# Altium PCB OK6410AV2.PcbDoc (part 2 of 4)
Units mm, origin at the board's own origin, x right, y up, seen from the top; angles counter-clockwise.
Board outline 144.31 x 105.28 mm, 4 copper layers (Top, GND, VCC, Bottom), stack 0.899 mm thick; 254 components, 278 nets, 1261 pads, 740 vias.
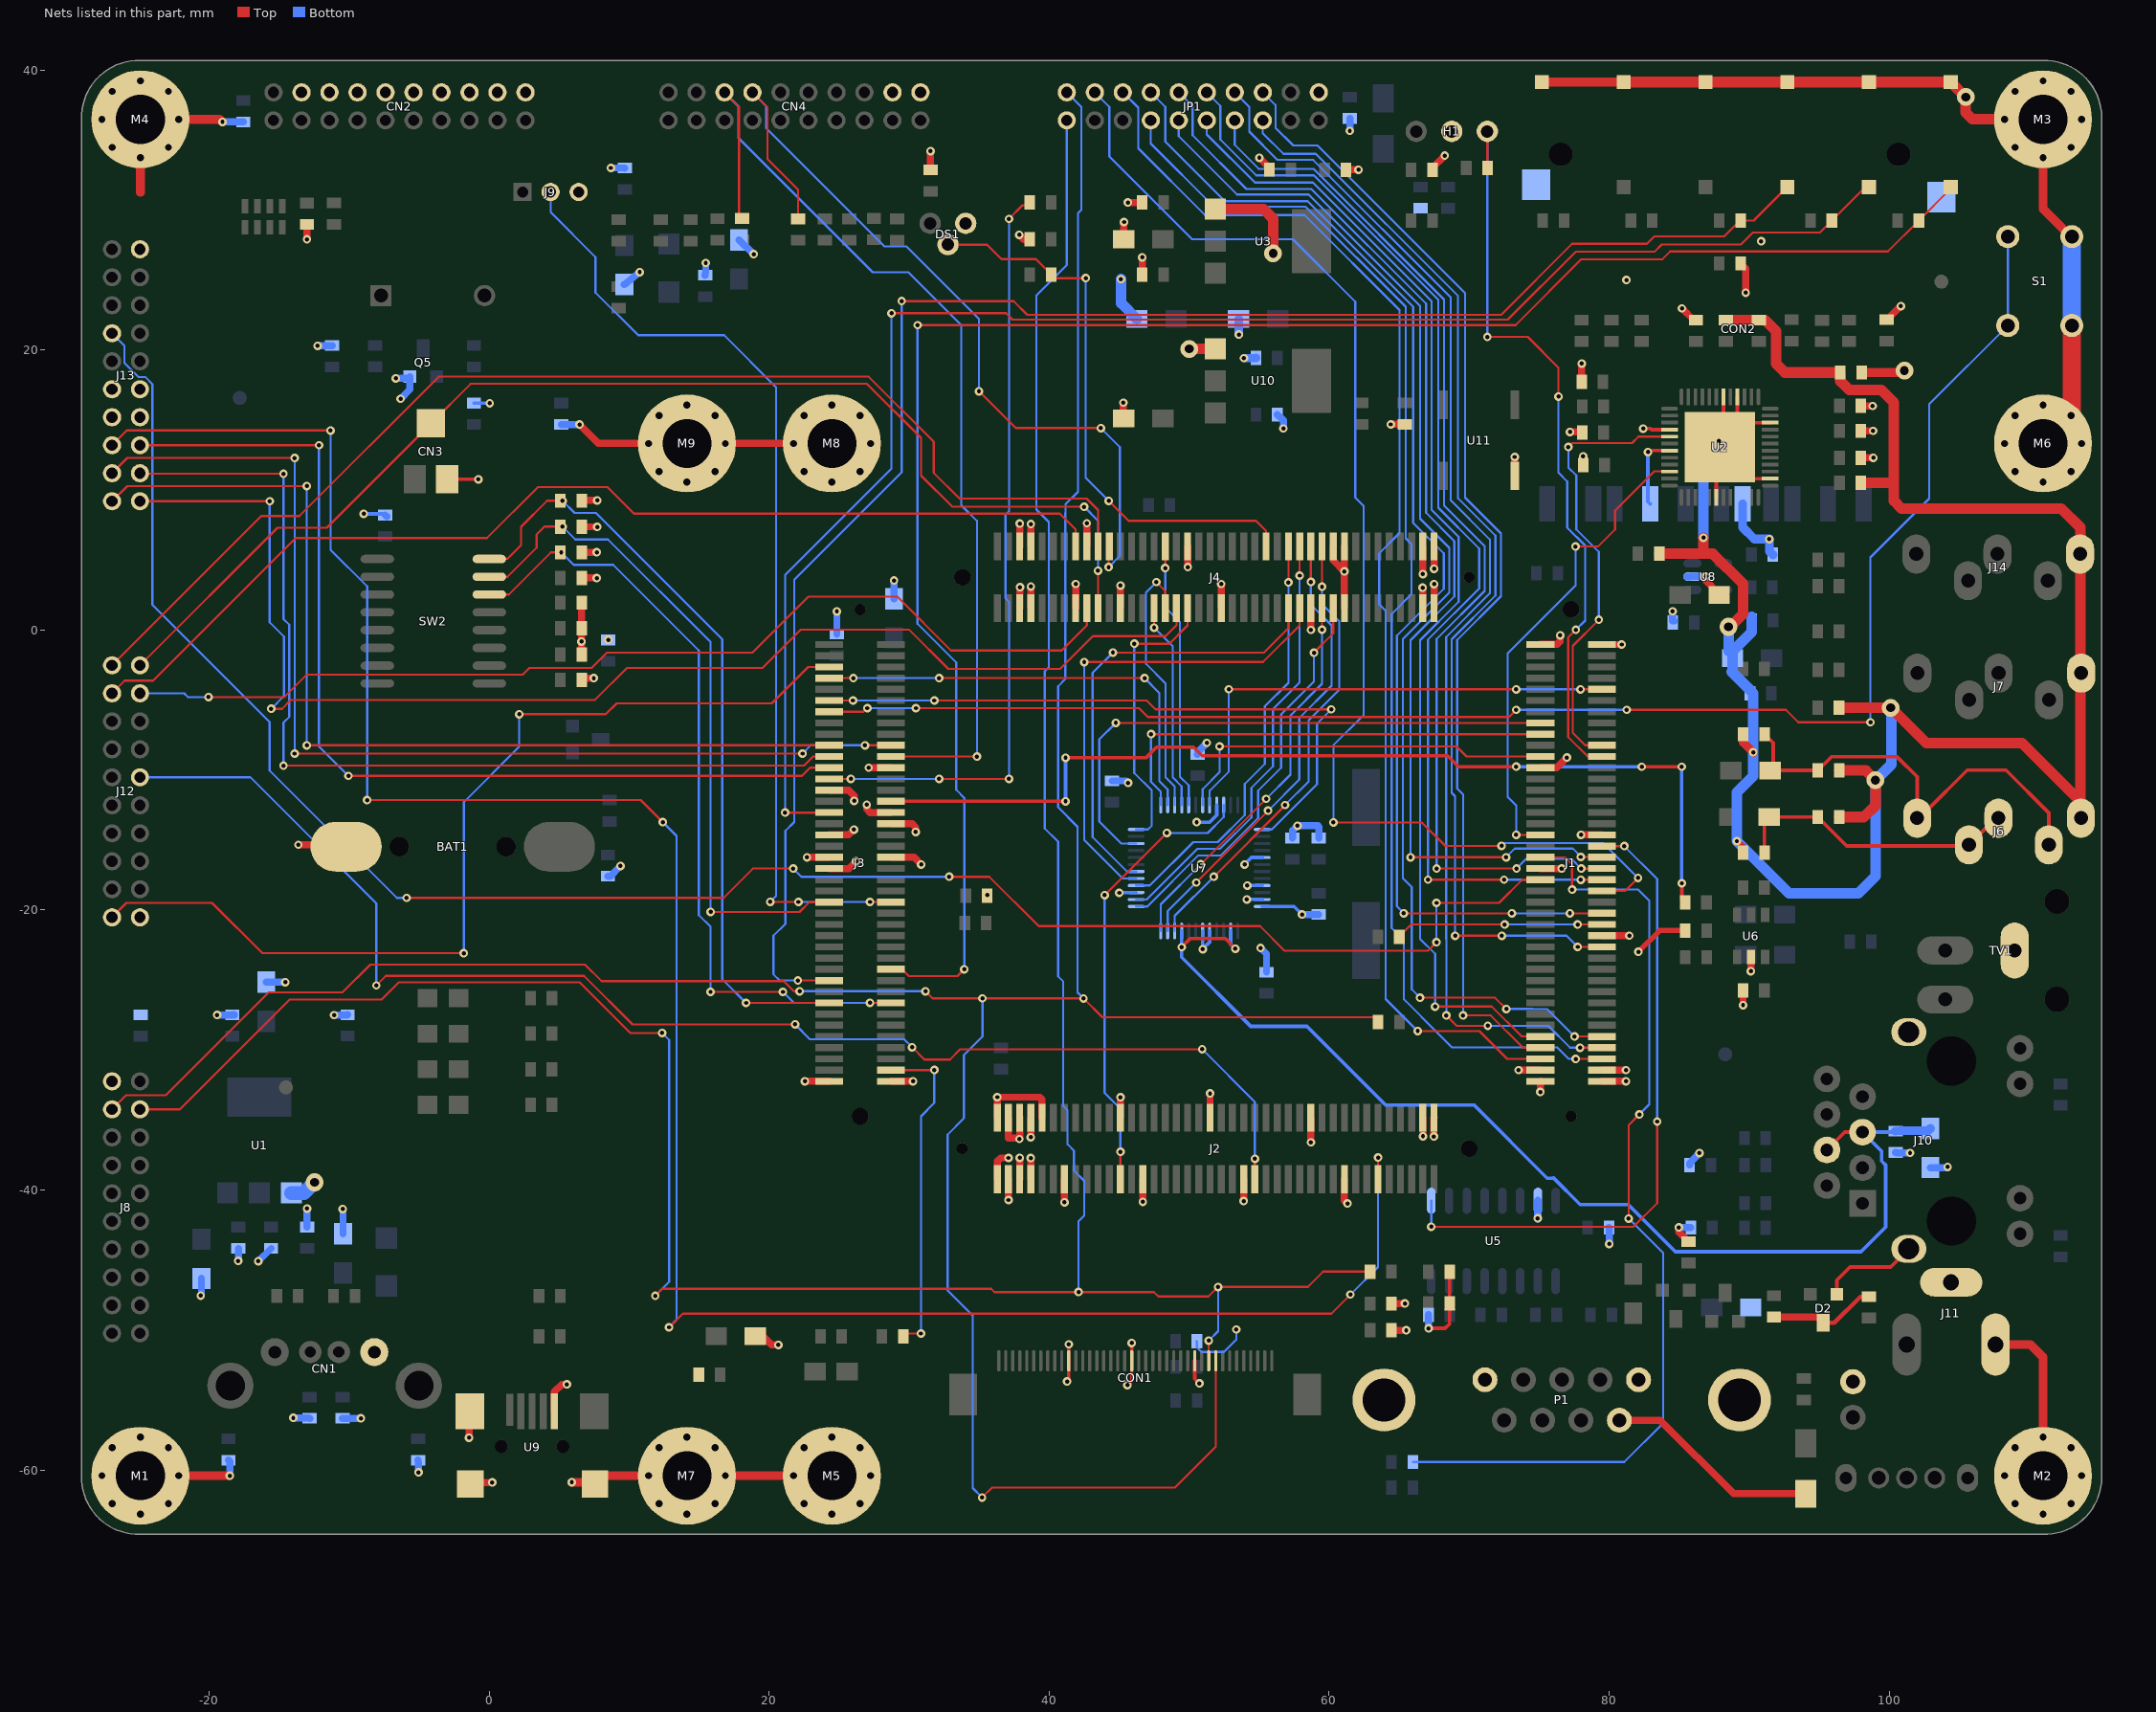
[diagram p4: the nets of this part, all layers, seen from the top]

## Via types
v1: diameter 0.61, hole 0.305, Top to Bottom, tented both sides, 719 vias
v2: diameter 1.27, hole 0.635, Top to Bottom, tented both sides, 21 vias

## Nets (pads, with @x,y where several pads share a name; then routed paths per layer and width w, separated by ;. In a path a pad name is that pad's centre, name@x,y a point inside that pad or via, vN(x,y) a via of type N, cw(c..) or ccw(c..) an arc to the next point about the centre after c; other vN are vias at no path point) (continued)
AC97_SDO: J1.19 U2.5 | length 32.1
  Top w0.152: v1(77.089,13.081) 77.371,13.363 81.642,13.363 82.1,13.821 U2.5@84.31,13.821 ; v1(79.26,0.74) 77.394,-1.126 77.394,-7.337 78.288,-8.231 J1.19@79.488,-8.231
  Bottom w0.152: v1(77.089,13.081) 77.089,11.608 77.648,11.049 77.648,7.188 79.26,5.576 v1(79.26,0.74)
AC97_SYNC: J1.36 U2.10 | length 34.3
  Top w0.152: v1(73.364,-14.631) 74.782,-14.631 J1.36@75.088,-14.631 ; v1(77.597,5.969) 79.197,5.969 80.416,7.188 80.416,8.534 83.231,11.349 84.282,11.349 U2.10@84.31,11.321
  Bottom w0.152: v1(73.364,-14.631) 73.364,-12.528 72.746,-11.911 72.746,-1.663 77.597,3.188 v1(77.597,5.969)
ADCIN0: CN3.2 J4.20 J12.19 | length 88.6
  Top w0.152: J12.19@-24.95,-2.517 -15.124,7.309 -11.614,7.309 -4.156,14.767 -1.334,17.589 26.987,17.589 30.845,13.731 30.845,11.041 33.08,8.807 v1(42.496,8.807) ; J4.20@43.49,1.569 43.49,3.256 v1(43.489,4.248)
  Bottom w0.152: v1(42.496,8.807) 43.489,7.814 v1(43.489,4.248)
ADCIN1: J4.19 J12.20 | length 86.8
  Top w0.152: J12.20@-26.95,-2.517 -16.286,8.147 -13.57,8.147 -3.614,18.103 27.109,18.103 31.749,13.462 31.749,11.232 33.589,9.393 42.664,9.393 43.49,8.568 J4.19@43.49,5.969
ADCIN2: J4.18 J12.17 | length 74.3
  Top w0.152: v1(-20.06,-4.782) -14.635,-4.782 -13.028,-3.175 2.406,-3.175 2.876,-2.705 7.313,-2.705 8.405,-1.613 18.802,-1.613 22.802,2.388 29.144,2.388 32.984,-1.453 40.896,-1.453 42.69,0.34 J4.18@42.69,1.569
  Bottom w0.152: J12.17@-24.95,-4.517 -21.8,-4.517 -21.536,-4.782 v1(-20.06,-4.782)
ADCIN3: J4.15 J12.18 | length 77.4
  Top w0.152: J12.18@-26.95,-4.517 -26.041,-3.608 -24.013,-3.608 -13.827,6.577 -0.168,6.577 3.475,10.221 8.436,10.221 10.333,8.324 40.764,8.324 41.89,7.198 J4.15@41.89,5.969
ADDR2: J1.9 U7.32 | length 35.5
  Top w0.152: v1(52.831,-4.227) v1(73.364,-4.23) ; v1(77.952,-4.23) J1.9@79.488,-4.231
  Bottom w0.152: U7.32@51.464,-12.495 51.464,-11.474 52.831,-10.107 v1(52.831,-4.227) ; v1(73.364,-4.23) v1(77.952,-4.23)
AVDD25: C76.2 C77.1 J10.4 J10.5 U7.2 U7.9 | length 83.2
  Top w0.254: v1(49.464,-22.647) 50.086,-22.024 52.562,-22.024 53.291,-22.753 v1(53.291,-22.764) ; J10.4@95.56,-37.137 96.83,-35.867 J10.5@98.1,-35.867
  Bottom w0.254: v1(49.464,-22.647) 49.464,-23.373 54.398,-28.307 58.406,-28.307 64.031,-33.932 70.355,-33.932 75.574,-39.152 76.029,-39.152 76.035,-39.145 77.933,-41.043 81.368,-41.043 84.723,-44.398 97.999,-44.398 99.75,-42.647 99.75,-38.222 99.456,-37.927 99.456,-37.222 J10.5@98.1,-35.867 100.599,-35.867 100.523,-35.791 C76.2@100.461,-35.791 ; v1(49.464,-22.647) U7.9@49.464,-21.495 ; U7.2@52.964,-21.495 52.964,-22.436 v1(53.291,-22.764)
  Bottom w0.635: C76.2@100.461,-35.791 100.834,-35.758 102.774,-35.758 C77.1@102.955,-35.599
CAMCLK: J1.51 R85.2 | length 14.9
  Top w0.152: R85.2@65.009,-21.924 65.009,-21.887 65.865,-21.031 v1(72.535,-21.031) ; v1(77.747,-21.031) J1.51@79.488,-21.031
  Bottom w0.152: v1(72.535,-21.031) v1(77.747,-21.031)
CAMHREF: J1.76 JP1.6 | length 90.7
  Top w0.152: v1(66.324,-28.641) 70.732,-28.641 72.722,-30.631 J1.76@75.088,-30.631
  Bottom w0.152: JP1.6@45.257,38.412 46.356,37.314 46.356,34.419 51.133,29.642 58.246,29.642 65.031,22.857 65.031,6.928 63.576,5.473 63.576,1.84 64.034,1.382 64.034,-26.352 v1(66.324,-28.641)
CAMPCLK: J1.49 JP1.8 | length 86.5
  Top w0.152: v1(65.332,-20.231) v1(73.056,-20.231) ; v1(77.193,-20.231) 79.248,-20.231 J1.49@79.488,-20.231
  Bottom w0.152: JP1.8@47.257,38.412 48.3,37.37 48.3,34.89 52.548,30.642 58.462,30.642 66.006,23.098 66.006,7.659 68.181,5.485 68.181,2.95 64.831,-0.4 64.831,-19.731 v1(65.332,-20.231) ; v1(73.056,-20.231) 74.641,-20.231 v1(77.193,-20.231)
CAMRSTN: J1.45 JP1.4 | length 91.8
  Top w0.152: v1(60.3,-13.741) 66.624,-13.741 68.301,-15.418 v1(72.314,-15.418) ; J1.45@79.488,-18.631 81.14,-18.631 v1(82.067,-17.704)
  Bottom w0.152: JP1.4@43.257,38.412 44.301,37.369 44.301,33.835 50.217,27.919 57.41,27.919 61.864,23.465 61.864,9.459 62.459,8.865 62.459,-6.071 60.3,-8.23 v1(60.3,-13.741) ; v1(72.314,-15.418) 72.517,-15.215 79.578,-15.215 v1(82.067,-17.704)
CAMVSYNC: J1.75 JP1.7 | length 91.2
  Top w0.152: v1(77.618,-30.635) J1.75@79.488,-30.631
  Bottom w0.152: JP1.7@47.257,36.412 47.257,34.752 51.773,30.237 58.329,30.237 65.464,23.102 65.464,6.552 65.886,6.129 65.886,2.568 64.457,1.14 64.457,-21.284 65.334,-22.162 65.334,-26.37 65.484,-26.52 67.646,-28.684 67.66,-28.697 68.769,-29.807 76.28,-29.807 77.108,-30.635 v1(77.618,-30.635)
CAMYDATA0: J1.74 JP1.16 | length 81.9
  Top w0.152: v1(69.57,-27.529) 71.541,-27.529 73.843,-29.831 J1.74@75.088,-29.831
  Bottom w0.152: JP1.16@55.257,38.412 56.165,37.505 56.165,35.891 57.434,34.622 59.16,34.622 69.711,24.072 69.711,9.464 72.272,6.903 72.272,2.424 69.142,-0.706 69.142,-11.313 69.57,-11.74 v1(69.57,-27.529)
CAMYDATA1: J1.55 JP1.15 | length 78.7
  Top w0.152: v1(68.997,-21.834) v1(72.332,-21.834) ; v1(77.75,-22.631) J1.55@79.39,-22.631 ; J1.55@79.39,-22.631 J1.55@79.488,-22.631
  Bottom w0.152: JP1.15@55.257,36.412 55.257,35.5 56.734,34.024 59.045,34.024 69.205,23.864 69.205,9.416 71.88,6.74 71.88,2.464 68.756,-0.661 68.756,-11.62 68.997,-11.862 v1(68.997,-21.834) ; v1(72.332,-21.834) 76.952,-21.834 v1(77.75,-22.631)
CAMYDATA2: J1.73 JP1.14 | length 88.3
  Top w0.152: v1(68.371,-27.529) 69.107,-28.265 v1(71.334,-28.265) ; v1(77.917,-29.832) 79.487,-29.832 J1.73@79.488,-29.831
  Bottom w0.152: JP1.14@53.257,38.412 54.296,37.374 54.296,35.606 56.315,33.587 58.852,33.587 68.676,23.763 68.676,9.277 71.477,6.476 71.477,2.623 68.357,-0.497 68.357,-22.062 68.371,-22.077 v1(68.371,-27.529) ; v1(71.334,-28.265) 75.65,-28.265 77.218,-29.832 v1(77.917,-29.832)
CAMYDATA3: J1.41 JP1.13 | length 76.9
  Top w0.152: v1(67.676,-17.031) v1@73.384,-17.031 ; v1(78.004,-17.038) 79.488,-17.038 J1.41@79.488,-17.031
  Bottom w0.152: JP1.13@53.257,36.412 53.257,34.662 54.966,32.954 58.873,32.954 68.212,23.615 68.212,8.89 71.102,5.999 71.102,2.796 67.676,-0.63 v1(67.676,-17.031) ; v1(73.384,-17.03) 74.068,-16.346 77.313,-16.346 v1(78.004,-17.038)
CAMYDATA4: J1.43 JP1.12 | length 80.7
  Top w0.152: v1(67.061,-17.831) v1(72.494,-17.832) ; v1(77.974,-17.833) J1.43@79.488,-17.831
  Bottom w0.152: JP1.12@51.257,38.412 52.226,37.443 52.226,35.041 54.78,32.487 58.906,32.487 67.788,23.605 67.788,8.748 70.713,5.823 70.713,2.972 67.061,-0.68 v1(67.061,-17.831) ; v1(72.494,-17.832) 76.792,-17.833 v1(77.974,-17.833)
CAMYDATA5: J1.72 JP1.11 | length 83.2
  Top w0.152: v1(67.566,-26.894) 71.614,-26.894 73.752,-29.031 J1.72@75.088,-29.031
  Bottom w0.152: JP1.11@51.257,36.412 51.257,35.408 54.697,31.969 58.832,31.969 67.31,23.491 67.31,8.6 69.249,6.662 69.249,2.032 66.5,-0.717 66.5,-22.076 67.566,-23.124 v1(67.566,-26.894)
CAMYDATA6: J1.39 JP1.10 | length 81
  Top w0.152: v1(65.812,-16.231) v1(72.639,-16.231) ; v1(77.966,-16.205) 79.462,-16.205 J1.39@79.488,-16.231
  Bottom w0.152: JP1.10@49.257,38.412 50.249,37.42 50.249,35.372 50.236,35.359 54.082,31.514 58.723,31.514 66.917,23.32 66.917,8.386 68.943,6.36 68.943,2.404 65.812,-0.727 v1(65.812,-16.231) ; v1(72.639,-16.231) 73.255,-15.615 77.408,-15.615 77.966,-16.173 v1(77.966,-16.205)
CAMYDATA7: J1.71 JP1.9 | length 89.7
  Top w0.152: v1(66.492,-26.264) 71.853,-26.264 v1(72.653,-27.064) ; v1(77.531,-29.032) 79.389,-29.032 79.39,-29.031 J1.71@79.488,-29.031
  Bottom w0.152: JP1.9@49.257,36.412 49.257,35.279 53.419,31.118 58.535,31.118 66.502,23.151 66.502,7.954 68.58,5.875 68.58,2.681 65.268,-0.631 65.268,-17.729 65.893,-18.354 65.893,-25.664 v1(66.492,-26.264) ; v1(72.653,-27.064) 74.511,-27.064 74.5,-27.075 75.574,-27.075 v1(77.531,-29.032)
CLKOUT: J1.40 R16.2 | length 68.1
  Top w0.152: J1.40@75.088,-16.231 76.845,-16.231 77.352,-16.738 v1(77.352,-18.534) ; v1(81.394,-42.036) 81.394,-35.362 v1(82.155,-34.6)
  Bottom w0.152: R16.2@65.975,-59.431 81.079,-59.431 83.853,-56.657 83.853,-44.495 v1(81.394,-42.036) ; v1(77.352,-18.534) 82.068,-18.534 82.871,-19.336 82.871,-33.885 v1(82.155,-34.6)
CSN1: J3.69 U7.37 | length 47.1
  Top w0.152: J3.69@24.289,-5.031 v1(25.988,-5.03) ; v1(31.796,-5.03) 46.961,-5.03 47.595,-5.665 v1(60.147,-5.664)
  Bottom w0.152: v1(25.988,-5.03) 27.014,-5.03 v1(31.796,-5.03) ; U7.37@55.214,-14.245 55.893,-14.245 59.131,-11.007 59.131,-6.68 v1(60.147,-5.664)
CTSN0: J1.37 U5.9 | length 46.8
  Top w0.152: v1(67.292,-42.619) 81.741,-42.619 83.43,-40.93 v1(83.43,-35.108) ; J1.37@79.488,-15.431 v1(81.078,-15.431)
  Bottom w0.152: v1(67.292,-42.619) U5.9@67.292,-40.767 ; v1(81.078,-15.431) 83.43,-17.783 v1(83.43,-35.108)
CTSN1: J1.44 J13.14 | length 137.8
  Top w0.152: v1(-5.913,-19.129) 16.742,-19.129 18.835,-17.035 v1(21.709,-17.035) ; v1(32.857,-17.621) 35.725,-17.621 39.253,-21.148 55.063,-21.148 56.814,-22.899 67.06,-22.899 v1(67.663,-22.296) ; v1(67.663,-19.487) 72.131,-19.487 73.787,-17.831 J1.44@75.088,-17.831
  Bottom w0.152: J13.14@-26.95,21.205 -26.07,20.325 -26.07,19.08 -25.074,18.085 -24.587,18.085 -24.071,17.569 -24.071,1.808 -15.694,-6.568 -15.694,-10.038 -6.603,-19.129 v1(-5.913,-19.129) ; v1(21.709,-17.035) 22.294,-17.621 v1(32.857,-17.621) ; v1(67.663,-22.296) v1(67.663,-19.487)
D2-3: D2.3 R79.2 R81.1 | length 7.7
  Top w0.305: D2.3@95.301,-49.479 96.088,-49.479 97.95,-47.617 R79.2@98.566,-47.617
  Top w0.508: R81.1@91.77,-49.073 94.894,-49.073 D2.3@95.301,-49.479
DAC_OUT0: J3.52 R35.1 | length 70.5
  Top w0.254: J3.52@28.689,-12.231 v1(41.168,-12.231) ; v1(41.168,-9.122) 46.916,-9.122 47.67,-8.368 50.314,-8.368 50.919,-8.972 68.459,-8.972 69.246,-9.759 v1(73.364,-9.759) ; v1(82.331,-9.761) v1(85.181,-9.761) ; v1(85.192,-18.085) 85.192,-19.223 R35.1@85.431,-19.463 85.45,-19.463 R35.1@85.585,-19.597
  Bottom w0.254: v1(41.168,-12.231) v1(41.168,-9.122) ; v1(73.364,-9.759) 73.365,-9.761 v1(82.331,-9.761) ; v1@85.181,-18.085 v1(85.181,-9.761)
DAC_OUT1: J3.75 J12.2 | length 69.3
  Top w0.152: J12.2@-26.95,-20.517 -25.923,-19.491 -19.803,-19.491 -16.21,-23.084 v1(-1.821,-23.084) ; v1(2.137,-6.007) 8.324,-6.007 9.104,-5.227 20.18,-5.227 22.777,-2.631 J3.75@24.289,-2.631
  Bottom w0.152: v1(-1.821,-23.084) -1.821,-12.283 2.137,-8.326 v1(2.137,-6.007)
DATA0: J4.54 U7.18 | length 32.6
  Top w0.152: v1(44.552,-1.608) 55.337,-1.608 57.09,0.145 J4.54@57.09,1.569
  Bottom w0.152: v1(44.552,-1.608) 43.107,-3.053 43.107,-14.797 45.555,-17.245 U7.18@46.214,-17.245
DATA1: J4.56 U7.17 | length 35.3
  Top w0.152: v1(42.5,-2.283) 55.267,-2.283 57.89,0.34 J4.56@57.89,1.569
  Bottom w0.152: 42.499,-6.238 42.499,-14.989 45.256,-17.745 U7.17@46.214,-17.745 ; 42.5,-6.238 v1(42.5,-2.283)
DATA2: J4.53 U7.16 | length 30.3
  Top w0.152: v1(57.09,3.403) 57.09,4.339 J4.53@57.09,5.969
  Bottom w0.152: U7.16@46.214,-18.245 47.19,-18.245 50.288,-15.147 52.033,-15.147 53.966,-13.214 53.966,-10.993 55.403,-9.556 55.403,-5.446 57.09,-3.759 v1(57.09,3.403)
DATA3: J4.55 U7.14 | length 31.4
  Top w0.152: v1(57.89,3.893) 57.89,4.583 57.89,4.584 J4.55@57.89,5.969
  Bottom w0.152: U7.14@46.214,-19.245 46.97,-19.245 50.589,-15.626 52.199,-15.626 54.444,-13.381 54.444,-11.275 55.982,-9.737 55.982,-5.643 57.89,-3.734 v1(57.89,3.893)
DATA4: J4.62 U7.13 | length 28.5
  Top w0.152: v1(58.909,-1.616) 60.29,-0.236 J4.62@60.29,1.569
  Bottom w0.152: U7.13@46.214,-19.745 47.006,-19.745 50.655,-16.096 52.254,-16.096 54.926,-13.424 54.926,-11.466 56.566,-9.826 56.566,-6.026 58.909,-3.683 v1(58.909,-1.616)
DATA5: J4.60 U7.12 | length 27.8
  Top w0.152: v1(50.824,-16.729) v1(55.499,-12.054) ; v1(59.489,0.031) J4.60@59.49,1.569
  Bottom w0.152: U7.12@47.964,-21.495 47.964,-19.589 v1(50.824,-16.729) ; v1(55.499,-12.054) 57.226,-10.327 57.226,-6.099 59.489,-3.835 v1(59.489,0.031)
DATA6: J4.57 U7.11 | length 32.9
  Top w0.152: v1(50.503,-18.034) v1(55.637,-12.9) ; v1(58.69,3.445) J4.57@58.69,5.969
  Bottom w0.152: U7.11@48.464,-21.495 48.464,-20.073 v1(50.503,-18.034) ; v1(55.637,-12.9) 57.861,-10.676 57.861,-6.274 60.173,-3.962 60.173,0.341 58.69,1.824 v1(58.69,3.445)
DATA7: J4.59 U7.10 | length 32.8
  Top w0.152: v1(51.76,-17.617) v1@56.863,-12.515 ; v1(59.49,3.101) J4.59@59.49,5.969
  Bottom w0.152: U7.10@48.964,-21.495 48.964,-20.414 v1(51.76,-17.617) ; v1(56.845,-12.497) 58.527,-10.815 58.527,-6.446 60.711,-4.262 60.711,0.63 59.49,1.852 v1(59.49,3.101)
DATA8: J1.22 U7.31 | length 27.9
  Top w0.152: v1(52.166,-8.31) 69.092,-8.31 69.813,-9.031 J1.22@75.088,-9.031
  Bottom w0.152: U7.31@50.964,-12.495 50.964,-11.36 52.166,-10.159 v1(52.166,-8.31)
DATA9: J4.31 U7.29 | length 19.2
  Top w0.152: v1(48.289,4.425) J4.31@48.29,5.969
  Bottom w0.152: v1(48.289,4.425) 48.289,1.615 49.339,0.566 49.339,-10.475 49.964,-11.1 U7.29@49.964,-12.495
DATA10: J4.30 U7.28 | length 14.9
  Top w0.152: J4.30@47.49,1.569 v1(47.491,0.178)
  Bottom w0.152: v1(47.491,0.178) 48.832,-1.164 48.832,-10.528 49.464,-11.16 U7.28@49.464,-12.495
DATA11: J4.32 U7.27 | length 19.2
  Top w0.152: v1(47.654,3.429) 48.157,2.926 48.163,2.926 48.29,2.799 J4.32@48.29,1.569
  Bottom w0.152: v1(47.654,3.429) 46.918,2.692 46.918,-2.421 48.313,-3.816 48.313,-10.517 48.964,-11.168 U7.27@48.964,-12.495
DATA12: J3.73 U7.26 | length 32.3
  Top w0.152: J3.73@24.289,-3.431 24.403,-3.431 v1(26.006,-3.43) ; v1(32.138,-3.43) v1(46.811,-3.43)
  Bottom w0.152: v1(26.006,-3.43) v1(32.138,-3.43) ; v1(46.811,-3.43) 47.873,-4.493 47.873,-10.796 48.464,-11.387 U7.26@48.464,-12.495
DATA13: J1.18 U7.25 | length 33.2
  Top w0.152: v1(47.273,-7.432) J1.18@75.088,-7.431
  Bottom w0.152: v1(47.273,-7.432) 47.273,-10.841 47.964,-11.532 U7.25@47.964,-12.495
DATA14: J4.36 U7.24 | length 20.3
  Top w0.152: v1(46.079,-0.971) 48.578,-0.971 49.89,0.34 J4.36@49.89,1.569
  Bottom w0.152: v1(46.079,-0.971) 46.079,-10.203 47.329,-11.453 47.329,-13.968 47.052,-14.245 U7.24@46.214,-14.245
DATA15: J1.16 U7.22 | length 41.2
  Top w0.152: v1(44.758,-6.629) 46.524,-6.629 J1.16@75.088,-6.631
  Bottom w0.152: v1(44.758,-6.629) 43.582,-7.805 43.582,-13.682 45.145,-15.245 U7.22@46.214,-15.245
DBGSEL: J3.34 J9.2 | length 69.8
  Top w0.152: v1(20.064,-19.416) v1(22.094,-19.42) ; v1(27.2,-19.42) J3.34@28.689,-19.431
  Bottom w0.152: J9.2@4.382,31.298 4.382,29.856 7.593,26.646 7.593,24.111 10.638,21.066 16.772,21.066 20.491,17.347 20.491,-18.99 v1(20.064,-19.416) ; v1(22.094,-19.42) v1(27.2,-19.42)
EINT13: J3.15 R41.1 SW2.8 | length 55.9
  Top w0.152: SW2.8@0,5.08 1.283,5.08 2.263,6.06 2.263,7.372 4.131,9.24 5.078,9.24 5.231,9.24 v1(5.235,9.235) ; v1(18.337,-26.63) 23.756,-26.63 23.757,-26.631 J3.15@24.289,-26.631
  Bottom w0.152: v1(5.235,9.235) 6.099,8.372 7.618,8.372 16.638,-0.648 16.638,-24.931 v1(18.337,-26.63)
EINT14: J3.33 R52.1 SW2.7 | length 49.3
  Top w0.152: SW2.7@0,3.81 1.304,3.81 3.376,5.882 3.376,6.825 3.942,7.391 5.078,7.391 v1(5.235,7.391) ; v1(15.815,-20.135) 22.164,-20.135 22.868,-19.431 J3.33@24.289,-19.431
  Bottom w0.152: v1(5.235,7.391) 6.147,6.48 8.474,6.48 15.815,-0.861 v1(15.815,-20.135)
EINT15: J3.16 R21.1 SW2.6 | length 57.1
  Top w0.152: SW2.6@0,2.54 1.398,2.54 4.405,5.547 R21.1@5.078,5.548 v1(5.141,5.547) ; v1(15.805,-25.845) v1(20.979,-25.845) ; v1(27.19,-26.629) 27.192,-26.631 J3.16@28.689,-26.631
  Bottom w0.152: v1(5.141,5.547) 6.023,4.666 8.855,4.666 14.971,-1.45 14.971,-20.354 15.805,-21.187 v1(15.805,-25.845) ; v1(20.979,-25.845) 21.763,-26.629 v1(27.19,-26.629)
EINT16: J2.33 J12.11 | length 99.4
  Top w0.152: v1(-8.069,-25.385) -7.378,-24.694 ; -7.378,-24.693 6.765,-24.693 10.239,-28.167 v1(21.85,-28.167) ; v1(30.207,-29.801) 31.081,-30.674 32.906,-30.674 33.642,-29.939 v1(50.926,-29.939) ; J2.33@54.689,-39.231 v1(54.689,-37.765)
  Bottom w0.152: J12.11@-24.95,-10.517 -17.067,-10.517 -8.069,-19.515 v1(-8.069,-25.385) ; v1(21.85,-28.167) 22.905,-29.222 29.628,-29.222 v1(30.207,-29.801) ; v1(50.926,-29.939) 54.689,-33.702 v1(54.689,-37.765)
GND: BAT1.2 C1.2 C2.2 C3.2 C4.2 C5.2 C6.2 C7.2 C8.2 C9.2 C10.2 C12.2 C13.2 C15.2 C16.2 C17.2 C20.1 C21.2 C22.2 C23.2 C24.2 C25.2 C26.2 C27.2 C28.2 C29.2 C30.2 C33.2 C34.2 C39.2 C41.2 C42.2 C50.2 C51.2 C52.2 C53.2 C54.2 C55.2 C58.2 C59.2 C63.2 C67.2 C69.1 C70.1 C71.2 C72.2 C73.2 C74.2 C75.1 C76.1 C77.2 C81.2 C83.2 C84.2 C85.1 C86.2 C90.2 C91.2 C92.2 C94.2 C96.2 C97.2 C98.1 C99.1 C100.1 C101.1 C102.1 C103.1 C104.1 CN1.4 CN2.4 CN2.6 CN2.8 CN2.10 CN2.12 CN2.14 CN2.16 CN2.18 CN2.20 CN3.1 CN4.18 CN4.20 CON1.11 CON1.20 CON1.29 CON2.3@89.535,9.017 CON2.6 CON2.12 CON2.13 D2.1 DS1.1 H1.2 J1.1 J1.2 J1.24 J1.35 J1.42 J1.53 J1.77 J1.78 J1.79 J1.80 J2.2 J2.4 J2.17 J2.24 J2.35 J2.42 J2.53 J2.58 J2.67 J2.72 J2.73 J2.74 J2.75 J2.76 J2.77 J2.78 J2.79 J2.80 J3.1 J3.2 J3.39 J3.41 J3.42 J3.45 J3.48 J3.50 J3.53 J3.58 J4.5 J4.6 J4.7 J4.8 J4.16 J4.17 J4.24 J4.35 J4.42 J4.58 J4.61 J4.63 J4.64 J4.77 J4.78 J4.79 J4.80 J8.20 J9.3 J10.13 J10.14 J11.2 J11.3 J12.1 J13.7 J13.8 J13.9 J13.10 J13.19 J16.2 JP1.20 LED6.2 M1.1 M1.2 M1.3 M1.4 M1.5 M1.6 M1.7 M1.8 M1.9 M2.1 M2.2 M2.3 M2.4 M2.5 M2.6 M2.7 M2.8 M2.9 M3.1 M3.2 M3.3 M3.4 M3.5 M3.6 M3.7 M3.8 M3.9 M4.1 M4.2 M4.3 M4.4 M4.5 M4.6 M4.7 M4.8 M4.9 M5.1 M5.2 M5.3 M5.4 M5.5 M5.6 M5.7 M5.8 M5.9 M6.1 M6.2 M6.3 M6.4 M6.5 M6.6 M6.7 M6.8 M6.9 M7.1 M7.2 M7.3 M7.4 M7.5 M7.6 M7.7 M7.8 M7.9 M8.1 M8.2 M8.3 M8.4 M8.5 M8.6 M8.7 M8.8 M8.9 M9.1 M9.2 M9.3 M9.4 M9.5 M9.6 M9.7 M9.8 M9.9 P1.1 P1.5 P1.6 P1.10 P1.11 Q5.E R5.1 R7.2 R8.2 R9.2 R10.2 R11.2 R21.2 R34.2 R39.1 R41.2 R42.2 R52.2 R53.2 R62.1 R63.2 R72.1 R84.2 R86.2 R89.2 R97.2 S1.3 S1.4 S2.2 S3.2 S4.2 S5.2 S6.2 S7.2 TV1.2 U1.2 U2.4 U2.7 U3.2 U5.15 U6.5 U7.5 U7.6 U7.15 U7.33 U7.41 U7.45 U7.47 U7.48 U8.2 U9.5 U9.6 U9.7 U9.8 U10.2 U11.2 | length 407.6
  Top w0.152: R53.2@35.566,-18.965 v1(35.571,-18.932) ; v1(64.4,14.692) v1@64.4,14.697 ; v1(77.2,14.159) v1@77.2,14.166 ; v1(82.43,14.395) v1@82.481,14.395
  Top w0.254: CN3.1@-3.016,10.776 v1(-0.781,10.776) ; v1(41.283,-53.672) 41.283,-53.612 41.396,-53.499 CON1.11@41.396,-52.199 v1(41.396,-51.018) ; v1(45.586,-53.936) 45.896,-53.626 CON1.20@45.896,-52.199 v1(45.896,-50.921) ; 50.396,-53.481 CON1.29@50.396,-52.199 ; 50.396,-53.481 v1(50.727,-53.812) ; v1(67.103,-49.88) 68.281,-49.88 68.605,-49.555 C30.2@68.605,-45.847 ; v1@82.481,14.395 82.955,14.395 83.029,14.321 U2.4@84.31,14.321 ; v1(82.768,12.716) 82.872,12.821 U2.7@84.31,12.821 ; D2.1@96.266,-47.447 96.266,-46.431 97.206,-45.491 100.105,-45.491 J10.13@101.4,-44.197
  Top w0.381: v1(82.092,-22.982) 83.615,-21.459 R34.2@85.438,-21.459
  Top w0.508: v1(-13.642,-15.334) -10.372,-15.334 BAT1.2@-10.23,-15.476 ; R72.1@-13.028,28.978 v1(-13.027,27.918) v1(-13.027,27.918) ; v1(-1.446,-57.691) -1.446,-55.865 U9.6@-1.389,-55.809 ; U9.8@-1.344,-61.009 -1.201,-60.884 v1(0.21,-60.884) ; U9.5@4.656,-55.809 4.656,-54.409 5.184,-53.881 v1(5.539,-53.881) ; v1(6.447,14.685) 7.801,13.331 M9.2@11.371,13.331 ; R11.2@6.602,-3.56 6.602,-3.477 6.65,-3.429 v1(7.466,-3.429) ; R10.2@6.602,-1.757 6.602,-0.831 v1(6.589,-0.818) 6.589,0.113 R9.2@6.602,0.125 R8.2@6.602,1.962 ; R7.2@6.628,3.73 7.652,3.73 v1(7.674,3.708) ; R21.2@6.739,5.549 7.595,5.549 v1(7.684,5.563) ; R52.2@6.739,7.378 7.705,7.378 v1(7.717,7.366) ; R41.2@6.739,9.24 6.77,9.271 v1(7.717,9.271) ; M9.4@16.871,13.331 M8.2@21.729,13.331 ; C6.2@19.379,-50.446 19.559,-50.446 20.173,-51.06 v1(20.656,-51.06) ; v1(22.552,-32.231) J3.1@24.289,-32.231 ; v1(22.692,-16.231) J3.41@24.289,-16.231 ; J3.39@24.289,-17.031 25.686,-17.031 v1(26.199,-16.518) ; J3.45@24.289,-14.631 25.672,-14.631 v1(26.05,-14.253) ; J3.53@24.289,-11.431 25.663,-11.431 26.073,-11.841 v1(26.073,-12.197) ; v1(26.967,-12.476) 26.967,-12.789 27.209,-13.031 J3.50@28.689,-13.031 ; v1(27.102,-9.832) 27.103,-9.831 J3.58@28.689,-9.831 ; J3.2@28.689,-32.231 v1(30.266,-32.231) ; J3.42@28.689,-16.231 30.337,-16.231 v1(30.848,-16.742) ; J3.48@28.689,-13.831 30.203,-13.831 30.457,-14.085 v1(30.457,-14.42) ; C96.2@31.524,32.869 v1(31.524,34.212) ; J2.79@36.289,-39.231 36.289,-37.939 36.523,-37.705 v1(37.088,-37.705) ; J2.80@36.289,-34.831 v1(36.289,-33.365) 39.345,-33.365 39.492,-33.513 39.489,-33.516 J2.72@39.489,-34.831 ; v1(37.089,-40.714) J2.77@37.089,-39.231 ; J2.78@37.089,-34.831 37.089,-36.301 v1@37.889,-36.301 ; v1(37.862,28.234) 38.183,27.913 38.189,27.92 R84.2@38.616,27.92 ; v1(37.872,-36.355) 37.889,-36.355 v1@37.889,-36.301 ; J4.5@37.89,5.969 v1(37.889,7.612) ; J2.75@37.889,-39.231 37.895,-39.236 37.895,-39.231 v1(37.895,-37.696) ; J2.76@37.889,-34.831 v1@37.889,-36.301 ; J4.6@37.89,1.569 37.89,3.038 v1(37.914,3.063) ; v1(38.679,-36.223) 38.679,-34.841 J2.74@38.689,-34.831 ; v1(38.682,-37.714) 38.689,-37.721 J2.73@38.689,-39.231 ; J4.7@38.69,5.969 v1(38.689,7.579) ; J4.8@38.69,1.569 v1(38.689,3.119) ; v1(41.089,-40.881) J2.67@41.089,-39.231 ; J4.16@41.89,1.569 v1(41.89,3.294) ; J4.17@42.69,5.969 v1(42.69,7.635) ; J2.58@45.089,-34.831 v1(45.09,-33.373) ; J4.24@45.09,1.569 v1(45.09,3.185) ; v1(45.295,16.247) C71.2@45.321,15.107 ; C51.2@45.321,27.92 45.321,29.123 v1(45.35,29.152) ; v1(45.616,30.541) 45.616,30.542 C53.2@46.642,30.542 ; C73.2@46.642,25.403 v1@46.642,26.63 ; v1(46.69,-40.838) J2.53@46.689,-39.231 ; J4.35@49.89,5.969 v1(49.899,4.501) ; v2(50.001,20.089) v2@50.001,20.095 ; J2.42@51.489,-34.831 v1(51.491,-33.093) v1(51.491,-33.093) ; v1(52.288,3.292) 52.288,1.57 J4.42@52.29,1.569 ; v1@53.889,-40.785 J2.35@53.889,-39.231 ; v1(55.012,33.737) 55.713,33.037 C54.2@55.733,32.889 ; v1@58.689,-36.595 J2.24@58.689,-34.831 ; J4.58@58.69,1.569 v1(58.695,0.015) ; J4.61@60.29,5.969 60.29,4.988 v1(61.089,4.188) ; J2.17@61.089,-39.231 61.075,-39.245 61.075,-40.73 v1(61.304,-40.958) ; J4.64@61.09,1.569 v1(61.089,4.188) ; J4.63@61.09,5.969 v1(61.089,4.188) ; C84.2@61.199,32.886 v1(62.091,32.886) ; v1@64.4,14.697 C81.2@65.409,14.697 ; C1.2@64.451,-50.019 65.262,-50.019 65.263,-50.02 v1(65.505,-50.02) ; C2.2@64.451,-48.117 64.465,-48.103 v1(65.413,-48.103) ; v1(66.675,3.028) 66.675,1.584 J4.78@66.69,1.569 ; J2.4@66.689,-34.831 66.701,-34.843 v1(66.701,-36.156) ; v1(66.69,4.006) J4.77@66.69,5.969 ; C7.2@67.381,32.884 67.381,33.02 v1(68.258,33.898) ; v1(67.481,-36.176) 67.481,-34.84 J2.2@67.489,-34.831 ; J4.80@67.49,1.569 v1(67.49,3.282) ; v1(67.49,4.376) J4.79@67.49,5.969 ; U11.2@73.249,11.011 v1@73.249,12.319 ; v1(73.534,-31.432) 73.535,-31.431 J1.78@75.088,-31.431 ; v1(75.079,-32.994) 75.088,-32.994 J1.80@75.088,-32.231 ; J1.42@75.088,-17.031 75.09,-17.033 v1(76.602,-17.033) ; J1.24@75.088,-9.831 76.263,-9.831 76.263,-9.818 v1(76.976,-9.104) ; J1.2@75.088,-1.031 75.099,-1.021 76.292,-1.021 76.501,-0.813 v1(76.501,-0.371) ; v1@77.2,14.166 78.083,14.166 R62.1@78.083,14.123 ; v1(77.984,-14.623) 79.488,-14.623 J1.35@79.488,-14.631 ; C15.2@78.039,17.746 v1(78.039,19.047) ; v1(78.14,12.411) 78.143,12.408 C59.2@78.143,11.782 ; J1.79@79.488,-32.231 81.193,-32.231 v1(81.195,-32.23) ; J1.77@79.488,-31.431 81.193,-31.431 v1(81.195,-31.432) ; J1.53@79.488,-21.831 v1(81.439,-21.831) ; J1.1@79.488,-1.031 v1(80.897,-1.031) ; P1.6@80.729,-56.446 83.649,-56.446 88.893,-61.691 LED6.2@94.458,-61.691 ; v1(84.974,-42.676) 84.974,-42.988 R97.2@85.674,-43.688 ; v1(85.203,22.985) 86.043,22.144 R63.2@86.197,22.144 ; v1(86.906,3.828) 86.906,3.531 87.791,2.646 87.791,2.582 C4.2@87.859,2.514 ; C16.2@89.388,26.192 89.755,25.826 v1(89.755,24.1) ; v1(89.566,-26.793) C100.1@89.566,-25.739 ; v1(90.126,-24.371) 90.133,-24.371 U6.5@90.133,-23.35 ; C41.2@97.981,12.307 v1(98.871,12.307) ; C42.2@97.981,14.23 v1(98.851,14.23) ; C39.2@97.981,16.023 98.828,16.023 v1(98.828,16.011) ; C102.1@99.833,22.174 v1(100.832,23.144)
  Top w0.635: -24.927,31.277 M4.5@-24.927,33.738 ; M1.4@-22.177,-60.405 v1(-18.543,-60.405) ; M4.4@-22.177,36.488 -19.248,36.488 v1(-19.059,36.299) ; v1(5.892,-60.874) 7.414,-60.874 U9.7@7.556,-61.009 8.16,-60.405 M7.2@11.371,-60.405 M7.1@14.121,-60.405 M7.4@16.871,-60.405 M5.2@21.729,-60.405 M5.1@24.479,-60.405 ; S7.2@75.191,39.149 S6.2@81.033,39.149 ; R39.1@98.036,18.404 100.954,18.404 v2(101.092,18.542) ; J11.2@107.603,-51.036 110.091,-51.036 110.997,-51.942 M2.3@110.997,-57.655 M2.1@110.997,-60.405 M2.2@108.247,-60.405 ; M3.1@110.997,36.488 M3.5@110.997,33.738 110.997,30.1 S1.4@113.02,28.077
  Top w0.762: v2@50.001,20.095 U10.2@51.871,20.095 ; U3.2@51.87,30.066 55.306,30.065 55.997,29.374 v2(55.997,26.912) ; S6.2@81.033,39.149 S5.2@86.875,39.149 S4.2@92.717,39.149 S3.2@98.559,39.149 S2.2@104.401,39.149 v2(105.471,38.075) 105.471,36.972 105.955,36.488 M3.2@108.247,36.488
  Top w1.27: M6.1@110.997,13.331 M6.7@112.997,15.331 113.052,15.386 S1.3@113.052,21.758
  Bottom w0.152: C24.2@-15.585,-44.166 C24.2@-15.571,-44.166 ; C90.2@8.492,-0.701 8.304,-0.701 v1(8.502,-0.701) ; C3.2@50.513,-50.794 50.513,-50.805 C3.2@50.554,-50.805 50.554,-51.24 50.876,-51.562 52.476,-51.562 53.365,-50.673 v1(53.365,-49.962) ; v1@56.664,14.403 v1(56.727,14.403) ; v1(61.471,35.66) v1@61.475,35.66 ; v1@84.974,-42.682 v1(84.974,-42.676)
  Bottom w0.254: v1(-8.966,8.306) -7.525,8.306 C86.2@-7.435,8.216 ; C83.2@-1.098,16.209 v1(0.029,16.209) ; v1(45.003,-18.769) 45.003,-18.745 U7.15@46.214,-18.745 ; v1(50.534,-13.721) 51.461,-13.721 51.964,-13.218 U7.33@51.964,-12.495 ; U7.6@50.964,-21.495 v1(50.965,-22.791) 51.464,-22.292 U7.5@51.464,-21.495 ; v1(53.955,-16.74) 54.45,-16.245 U7.41@55.214,-16.245 ; v1(54.112,-19.236) 55.205,-19.236 U7.47@55.214,-19.245 ; v1(54.142,-18.245) U7.45@55.214,-18.245 ; U7.48@55.214,-19.745 57.491,-19.745 v1(58.062,-20.317) ; v1(82.768,12.716) 82.768,9.18 CON2.6@82.931,9.017
  Bottom w0.508: v1(-20.613,-47.545) -20.561,-47.497 C21.2@-20.562,-46.315 ; v1(-19.441,-27.495) -18.217,-27.495 -18.204,-27.483 C91.2@-18.361,-27.483 ; v1(-19.059,36.299) C101.1@-17.574,36.299 ; C58.2@-18.634,-59.302 -18.543,-59.393 v1(-18.543,-60.405) ; v1(-17.933,-45.06) -17.924,-45.051 C23.2@-17.924,-44.166 ; v1(-16.498,-45.085) C24.2@-15.571,-44.166 ; C22.2@-15.922,-25.15 -14.571,-25.15 v1(-14.571,-25.149) ; v1(-14.001,-56.274) -12.942,-56.274 R86.2@-12.83,-56.309 ; C28.2@-13.016,-42.648 v1(-13.012,-41.321) ; v1(-12.27,20.311) -11.241,20.311 C92.2@-11.223,20.329 ; v1(-11.086,-27.502) -10.145,-27.502 C98.1@-10.12,-27.477 ; R89.2@-10.484,-56.309 v1(-9.177,-56.309) ; v1(-10.47,-41.354) -10.447,-41.354 C12.2@-10.447,-43.127 ; C86.2@-7.435,8.216 -7.326,8.106 C86.2@-7.326,8.101 ; v1(-6.672,17.987) -5.798,17.987 Q5.E@-5.674,18.111 -5.674,17.187 v1(-6.339,16.521) ; C33.2@-5.081,-59.302 -5.054,-59.494 v1(-5.054,-60.172) ; R5.1@5.145,14.685 v1(6.447,14.685) ; C34.2@8.475,-17.585 8.641,-17.585 v1(9.378,-16.848) ; v1(8.687,33.014) 9.615,33.014 C26.2@9.679,33.004 ; C25.2@9.651,24.684 v1(10.747,25.577) ; C97.2@15.425,25.351 15.464,25.639 v1(15.464,26.227) ; C55.2@17.831,27.871 v1(18.891,26.852) ; v1(24.828,1.339) v1(24.828,1.339) C5.2@24.829,-0.284 ; C8.2@28.908,2.238 28.908,3.545 v1(28.913,3.545) ; C99.1@44.494,-10.773 45.498,-10.773 v1(45.642,-10.917) ; C103.1@50.592,-8.874 50.613,-8.853 50.613,-8.699 v1(51.256,-8.057) ; v1(55.096,-22.702) 55.524,-23.131 R42.2@55.524,-24.435 ; C52.2@56.29,15.395 56.304,15.395 56.727,14.972 v1(56.727,14.403) ; C104.1@57.369,-14.858 57.392,-14.835 57.392,-14.323 v1(57.738,-13.978) 59.19,-13.978 59.274,-14.062 59.274,-14.843 C20.1@59.26,-14.857 ; v1@58.063,-20.317 C69.1@59.242,-20.317 ; v1@61.475,35.66 C85.1@61.475,36.549 ; C63.2@67.094,-48.909 67.103,-49.121 v1(67.103,-49.88) ; v1(74.902,-42.024) v1@74.912,-42.024 ; C9.2@79.985,-42.682 80.008,-42.705 v1(80.008,-43.844) ; v1(84.531,1.346) 84.531,0.649 84.549,0.649 84.551,0.649 C10.2@84.654,0.646 ; v1@84.974,-42.682 C70.1@85.843,-42.682 ; U8.2@85.556,3.812 85.776,3.812 U8.2@85.782,3.818 ; C75.1@85.746,-38.206 85.746,-38.096 v1(86.444,-37.354) ; v1(86.906,3.828) U8.2@85.949,3.828 ; C76.1@100.461,-37.315 100.503,-37.315 100.535,-37.346 v1(101.495,-37.346) ; C77.2@102.955,-38.393 104.18,-38.393 v1(104.18,-38.342) ; U8.2@85.782,3.818 U8.2@85.949,3.823 U8.2@85.949,3.828 ; U8.2@85.782,3.818 85.791,3.828 U8.2@85.949,3.828
  Bottom w0.559: v1@74.912,-42.024 U5.15@74.912,-40.767
  Bottom w0.61: C72.2@53.533,22.229 53.533,21.112 v1(53.544,21.112) ; v1(53.912,19.425) C74.2@54.771,19.444
  Bottom w0.635: CON2.3@89.535,9.017 89.535,7.341 90.373,6.502 v1(91.44,6.502) 91.44,5.639 C67.2@91.694,5.385
  Bottom w0.762: v1(45.124,25.069) 45.124,23.339 45.155,23.339 C50.2@46.266,22.228
  Bottom w1.016: U1.2@-14.128,-40.213 -13.244,-40.213 v2(-12.478,-39.447)
  Bottom w1.27: S1.3@113.052,21.758 S1.4@113.052,28.108
  other v1: 53.89,-40.785 58.69,-36.596 73.254,12.37 81.232,25.007 46.643,26.631 90.86,27.771
GND_AC97: C11.2 C48.2 C49.2 C60.2 C61.2 C62.2 C65.2 C66.2 C68.2 J6.5 J7.5 J14.5 R39.2 R68.1 R69.1 R70.2 U2.18 U2.26 U2.34 U2.40 U2.42 U2.49 | length 173.2
  Top w0.254: U2.18@87.66,9.471 87.66,12.821 U2.49@87.91,13.071 U2.49@87.91,13.087 ; U2.42@88.16,16.671 U2.49@88.16,14.821 ; U2.40@89.16,16.671 U2.49@89.16,14.821 ; U2.26@91.51,10.821 88.067,10.821 88.067,13.244 U2.49@87.91,13.087 ; U2.34@91.51,14.821 U2.49@89.16,14.821 ; U2.49@87.91,13.087 87.91,13.4 88.247,13.737 87.163,14.821 U2.49@88.16,14.821 ; U2.49@88.16,14.821 U2.49@89.16,14.821
  Top w0.508: v1(89.122,-15.079) 89.619,-15.577 89.573,-15.622 C49.2@89.573,-15.896 C49.2@89.438,-15.896
  Top w0.635: C48.2@89.573,-7.438 89.589,-7.454 89.589,-8.023 v1(90.295,-8.729)
  Top w0.762: C60.2@83.574,5.472 86.741,5.472 ; v1(86.741,6.604) 86.741,5.472 ; C65.2@88.341,22.144 C62.2@90.705,22.144 91.14,22.144 91.917,21.367 91.917,19.024 92.537,18.404 R39.2@96.512,18.404 96.512,17.788 97.155,17.145 99.441,17.145 100.33,16.256 100.33,10.541 ; v2(88.531,0.234) 88.671,0.373 88.771,0.373 89.561,1.164 89.561,3.305 87.394,5.472 86.741,5.472 ; R70.2@96.419,-5.549 v2(100.117,-5.549) 102.647,-8.079 109.495,-8.079 113.664,-12.248 113.664,7.328 112.305,8.687 100.889,8.687 100.33,9.246 100.33,10.541 ; R69.1@96.426,-13.356 98.176,-13.356 98.189,-13.37 99.027,-12.532 v2(99.027,-10.72) 98.331,-10.024 R68.1@96.426,-10.024 ; C61.2@97.981,10.514 100.303,10.514 100.33,10.541
  Bottom w0.508: v1@87.778,13.618 87.839,13.557 v1(87.839,13.514)
  Bottom w0.762: v1(86.741,6.604) 86.741,11.435 87.839,12.533 v1(87.839,13.514) ; v2(88.531,0.234) 88.536,-0.051 88.536,-1.515 C68.2@88.816,-1.515 ; C66.2@90.063,-4.284 88.763,-2.984 88.816,-2.932 C68.2@88.816,-1.991 C68.2@88.816,-1.515 ; C66.2@90.063,-4.284 90.178,-4.399 90.295,-4.515 v1(90.295,-8.729) 90.295,-10.429 89.122,-11.602 v1(89.122,-15.079) 92.843,-18.8 97.808,-18.8 99.027,-17.581 v2(99.027,-10.72) 100.155,-9.592 100.155,-5.587 v2(100.117,-5.549) ; C11.2@90.175,0.941 90.183,0.933 90.183,0.693 90.183,-0.147 C68.2@88.816,-1.515
GPE0: DS1.2 J4.49 R38.1 | length 41.1
  Top w0.152: DS1.2@32.765,27.534 35.556,27.534 36.591,26.499 39.044,26.499 R38.1@40.14,25.403 40.253,25.403 40.293,25.363 40.072,25.142 v1(42.605,25.142) ; v1(44.258,9.23) 45.685,7.803 54.778,7.803 55.49,7.091 J4.49@55.49,5.969
  Bottom w0.152: v1(42.605,25.142) 42.605,10.883 v1(44.258,9.23)
GPE1: H1.1 J1.21 R40.1 | length 54
  Top w0.152: v1(71.297,20.943) 74.18,20.943 76.378,18.745 v1(76.378,16.688) ; H1.1@71.297,35.626 71.297,34.026 71.291,34.019 71.291,33.019 R40.1@71.317,33.019 ; v1(77.622,0.025) 77.075,-0.522 77.075,-7.636 78.47,-9.031 J1.21@79.488,-9.031
  Bottom w0.152: v1(71.297,20.943) 71.297,27.062 H1.1@71.297,35.626 ; v1(76.378,16.688) 76.378,11.252 77.013,10.617 77.013,7.315 78.283,6.045 78.283,0.686 v1(77.622,0.025)
GPK5: J2.11 J13.6 | length 163.8
  Top w0.152: J13.6@-26.95,13.205 -25.893,14.262 v1(-11.336,14.262) ; v1(-8.724,-12.141) 10.82,-12.141 v1(12.395,-13.716) ; v1(12.84,-49.806) 13.819,-48.827 60.154,-48.827 v1(61.514,-47.467) ; J2.11@63.489,-39.231 v1(63.489,-37.683)
  Bottom w0.152: v1(-11.336,14.262) -11.336,5.728 -8.724,3.117 v1(-8.724,-12.141) ; v1(12.395,-13.716) 13.387,-14.707 13.387,-49.26 v1(12.84,-49.806) ; v1(61.514,-47.467) 63.489,-45.492 v1(63.489,-37.683)
GPP1: J4.34 J13.1 | length 95.6
  Top w0.152: J13.1@-24.95,9.205 -20.547,9.205 v1(-15.688,9.206) ; v1(-15.577,-5.624) -14.81,-5.624 -14.173,-4.986 7.547,-4.986 9.834,-2.699 19.523,-2.699 22.26,0.038 29.975,0.038 32.789,-2.776 40.781,-2.776 43.121,-0.437 48.312,-0.437 49.09,0.34 J4.34@49.09,1.569
  Bottom w0.152: v1(-15.688,9.206) -15.688,0.558 -14.663,-0.467 -14.663,-4.709 v1(-15.577,-5.624)
GPP8: J3.61 J13.2 | length 70.2
  Top w0.152: J13.2@-26.95,9.205 -25.865,10.29 v1(-13.04,10.29) ; v1(-13.04,-8.232) 7.755,-8.232 10.226,-8.231 J3.61@24.289,-8.231
  Bottom w0.152: v1(-13.04,-8.232) v1(-13.04,10.29)
GPP9: J3.59 J13.3 | length 70.7
  Top w0.152: J13.3@-24.95,11.205 -24.888,11.205 -24.847,11.164 v1(-14.698,11.164) ; v1(-14.698,-9.682) -12.258,-9.682 22.495,-9.683 23.146,-9.031 J3.59@24.289,-9.031
  Bottom w0.152: v1(-14.698,-9.682) -14.698,-6.604 -14.295,-6.2 -14.295,0.384 -14.698,0.787 v1(-14.698,11.164)
GPP10: CN4.8 J4.21 R32.1 | length 61.5
  Top w0.152: CN4.8@18.804,38.412 19.881,37.336 19.869,37.323 19.869,33.649 22.066,31.452 R32.1@22.066,29.375 ; v1(34.981,17.064) 37.615,14.43 v1(43.686,14.43) ; v1(44.243,4.499) 44.243,5.923 J4.21@44.29,5.969
  Bottom w0.152: CN4.8@18.804,38.412 19.787,37.43 19.787,35.856 28.229,27.414 29.794,27.414 34.981,22.228 v1(34.981,17.064) ; v1(43.686,14.43) 45.05,13.066 45.05,5.305 v1(44.243,4.499)
GPP11: CN4.6 J3.60 R33.1 | length 72.5
  Top w0.152: CN4.6@16.804,38.412 17.839,37.378 17.839,29.305 18.056,29.522 R33.1@18.056,29.403 ; J3.60@28.689,-9.031 31.202,-9.031 v1(34.835,-9.031)
  Bottom w0.152: CN4.6@16.804,38.412 17.791,37.426 17.791,35.16 27.391,25.56 29.943,25.56 33.723,21.78 33.723,8.914 34.835,7.801 v1(34.835,-9.031)
GPP12: J3.62 J13.4 | length 77.5
  Top w0.152: J13.4@-26.95,11.205 -25.86,12.294 v1(-13.903,12.294) ; v1(-13.903,-8.824) 7.646,-8.824 9.672,-8.823 v1(22.382,-8.823) ; v1(26.842,-8.232) J3.62@28.689,-8.231
  Bottom w0.152: v1(-13.903,-8.824) v1(-13.903,12.294) ; v1(22.382,-8.823) 22.974,-8.232 v1(26.842,-8.232)
GPP13: J3.57 J13.5 | length 71.9
  Top w0.152: J13.5@-24.95,13.205 v1(-12.164,13.205) ; v1(-10.063,-10.414) 22.336,-10.414 22.919,-9.831 J3.57@24.289,-9.831
  Bottom w0.152: v1(-12.164,13.205) -12.164,-8.313 v1(-10.063,-10.414)
GPP14: J3.55 R83.2 | length 55.3
  Top w0.152: J3.55@24.289,-10.631 v1(25.826,-10.631) ; v1(32.138,-10.631) v1(37.126,-10.631) ; v1(37.126,29.374) 38.098,30.346 38.748,30.346 38.748,30.409 R83.2@38.616,30.541
  Bottom w0.152: v1(25.826,-10.631) v1(32.138,-10.631) ; v1(37.126,-10.631) 37.126,2.035 36.883,2.278 36.883,8.243 37.126,8.486 v1(37.126,29.374)
HPL: C46.2 C48.1 J6.1 J6.2 R68.2 | length 30.6
  Top w0.254: C48.1@91.097,-7.438 91.717,-8.058 C46.2@91.717,-10.024 ; C46.2@91.492,-10.024 C46.2@91.717,-10.024 ; R68.2@94.902,-10.024 C46.2@91.717,-10.024 ; R68.2@94.902,-10.024 95.873,-9.053 100.578,-9.053 102.004,-10.48 J6.1@102.004,-13.076 ; J6.1@102.159,-12.922 102.667,-12.922 105.581,-10.008 108.356,-10.008 111.404,-13.056 J6.2@111.404,-14.986
HPR: C44.2 C49.1 J6.3 J6.4 R69.2 | length 21.5
  Top w0.254: C49.1@91.097,-15.896 91.097,-13.461 91.463,-13.461 91.463,-13.393 C44.2@91.426,-13.356 R69.2@94.902,-13.356 96.964,-15.418 105.628,-15.418 107.614,-13.432 J6.4@107.957,-13.432 ; J6.3@105.437,-14.158 J6.3@105.664,-14.158 ; J6.4@107.614,-13.076 J6.4@107.804,-13.076
HSYNC: J3.4 R65.2 | length 24
  Top w0.152: J3.4@28.689,-31.431 v1(31.791,-31.431) ; R65.2@29.574,-50.448 29.504,-50.378 29.665,-50.378 29.665,-50.309 29.606,-50.25 v1(30.839,-50.25)
  Bottom w0.152: v1(30.839,-50.25) 30.839,-34.728 31.791,-33.776 v1(31.791,-31.431)
I2CSCL0: CON1.32 J8.18 JP1.2 R67.2 | length 225.1
  Top w0.152: J8.18@-26.95,-34.235 -25.94,-33.225 -23.106,-33.225 -15.758,-25.878 -10.488,-25.878 -8.503,-23.893 6.842,-23.893 8.029,-25.081 21.041,-25.081 21.76,-25.799 v1(22.177,-25.799) ; v1(31.156,-25.799) 31.665,-26.308 v1(35.234,-26.308) 42.448,-26.308 v1(42.45,-26.311) 43.799,-27.66 63.147,-27.66 R67.2@63.492,-28.005 ; v1(35.201,-61.962) 35.9,-61.264 48.962,-61.264 51.896,-58.33 CON1.32@51.896,-52.199
  Bottom w0.152: v1(22.177,-25.799) v1(31.156,-25.799) ; v1(35.201,-61.962) 34.536,-61.297 34.536,-48.97 32.74,-47.174 32.74,-36.042 33.906,-34.876 33.906,-30.35 35.234,-29.021 v1(35.234,-26.308) ; JP1.2@41.257,38.412 42.293,37.377 42.293,30.016 42.051,29.775 42.051,9.876 41.16,8.985 41.16,8.353 41.155,8.347 41.155,-3.497 40.634,-4.017 40.634,-12.658 42.026,-14.051 42.026,-25.887 v1(42.45,-26.311)
I2CSDA0: CON1.31 J8.17 JP1.1 R96.1 | length 206.2
  Top w0.152: J8.17@-24.95,-34.235 -22.102,-34.235 -14.253,-26.386 -7.697,-26.386 -6.471,-25.16 6.452,-25.16 10.069,-28.776 v1(12.347,-28.776) ; v1(11.857,-47.556) 12.359,-47.054 35.86,-47.054 36.092,-47.286 v1(42.093,-47.286) 47.481,-47.286 47.801,-47.606 51.38,-47.606 v1(52.066,-46.92) 58.487,-46.92 59.579,-45.829 R96.1@62.927,-45.828 ; CON1.31@51.396,-52.199 v1(51.396,-50.754)
  Bottom w0.152: v1(11.857,-47.556) 12.855,-46.557 12.855,-29.285 v1(12.347,-28.776) ; JP1.1@41.258,36.412 41.258,26.072 39.082,23.897 39.082,8.609 39.966,7.725 39.966,-2.658 39.676,-2.947 39.676,-14.165 40.632,-15.12 40.632,-24.731 41.005,-25.104 41.005,-33.993 41.313,-34.302 41.313,-36.734 41.772,-37.192 41.772,-38.618 42.496,-39.342 42.496,-41.827 42.093,-42.229 v1(42.093,-47.286) ; v1(51.396,-50.754) 52.066,-50.084 v1(52.066,-46.92)
IRQ_LAN: J2.57 U7.34 | length 32.4
  Top w0.152: v1(43.957,-18.936) v1(48.4,-14.493) ; J2.57@45.089,-39.231 45.089,-38.919 v1(45.089,-37.273)
  Bottom w0.152: v1(43.957,-18.936) 43.957,-33.061 45.089,-34.192 v1(45.089,-37.273) ; v1(48.4,-14.493) 51.324,-14.493 52.464,-13.353 U7.34@52.464,-12.495
KEY_RST: J3.67 S1.1 S1.2 | length 114
  Top w0.152: J3.67@24.289,-5.831 26.736,-5.831 v1@26.953,-5.614 ; v1(30.478,-5.576) 46.417,-5.576 47.044,-6.203 72.856,-6.203 v1(73.364,-5.695) ; v1(81.251,-5.696) 92.632,-5.696 93.518,-6.583 v1(98.667,-6.583)
  Bottom w0.152: v1(27.014,-5.576) v1(30.478,-5.576) ; v1(73.364,-5.695) 76.17,-5.696 v1(81.251,-5.696) ; v1(98.667,-6.583) 98.667,5.195 102.87,9.398 102.87,16.149 S1.1@108.48,21.758 S1.2@108.48,28.108
KEYINT1: J3.22 R78.2 S2.1 | length 131
  Top w0.152: J3.22@28.689,-24.231 29.491,-24.231 29.975,-24.715 33.45,-24.715 v1(33.934,-24.231) ; v1(30.593,21.786) 35.823,21.786 ; 35.823,21.786 73.31,21.786 78.018,26.493 83.805,26.493 84.357,27.045 99.914,27.045 R78.2@102.129,29.259 104.319,31.45 104.319,31.568 S2.1@104.401,31.649
  Bottom w0.152: v1(30.593,21.786) 30.593,0.451 33.35,-2.305 33.35,-11.412 33.934,-11.996 v1(33.934,-24.231)
KEYINT2: J3.49 R77.2 S3.1 | length 115.9
  Top w0.152: v1(21.135,-13.039) 24.289,-13.039 J3.49@24.289,-13.031 ; v1(28.734,22.636) 36.907,22.636 37.37,22.173 72.751,22.173 77.602,27.024 83.234,27.024 83.757,27.548 89.414,27.548 90.27,28.403 95.053,28.403 R77.2@95.909,29.259 98.298,31.649 S3.1@98.559,31.649
  Bottom w0.152: v1(21.135,-13.039) 21.135,3.949 28.734,11.549 v1(28.734,22.636)
KEYINT3: J3.19 R75.2 S4.1 | length 123.5
  Top w0.152: v1(22.046,-25.031) J3.19@24.289,-25.031 ; v1(29.461,23.5) 37.452,23.5 38.428,22.524 72.28,22.524 77.351,27.595 82.691,27.595 83.221,28.126 88.218,28.126 89.352,29.259 R75.2@89.388,29.259 90.388,29.259 90.388,29.32 S4.1@92.717,31.649
  Bottom w0.152: v1(22.046,-25.031) 20.743,-25.031 20.301,-24.589 20.301,-21.831 21.147,-20.985 21.147,-14.34 21.782,-13.705 21.782,3.597 29.461,11.276 29.461,21.21 v1(29.461,23.5)